# Altium PCB PCB1.PcbDoc
Units mm, origin at the board's own origin, x right, y up, seen from the top; angles counter-clockwise.
Board outline 76.58 x 53.47 mm, 2 copper layers (Top Layer, Bottom Layer); 39 components, 52 nets, 167 pads, 39 vias.
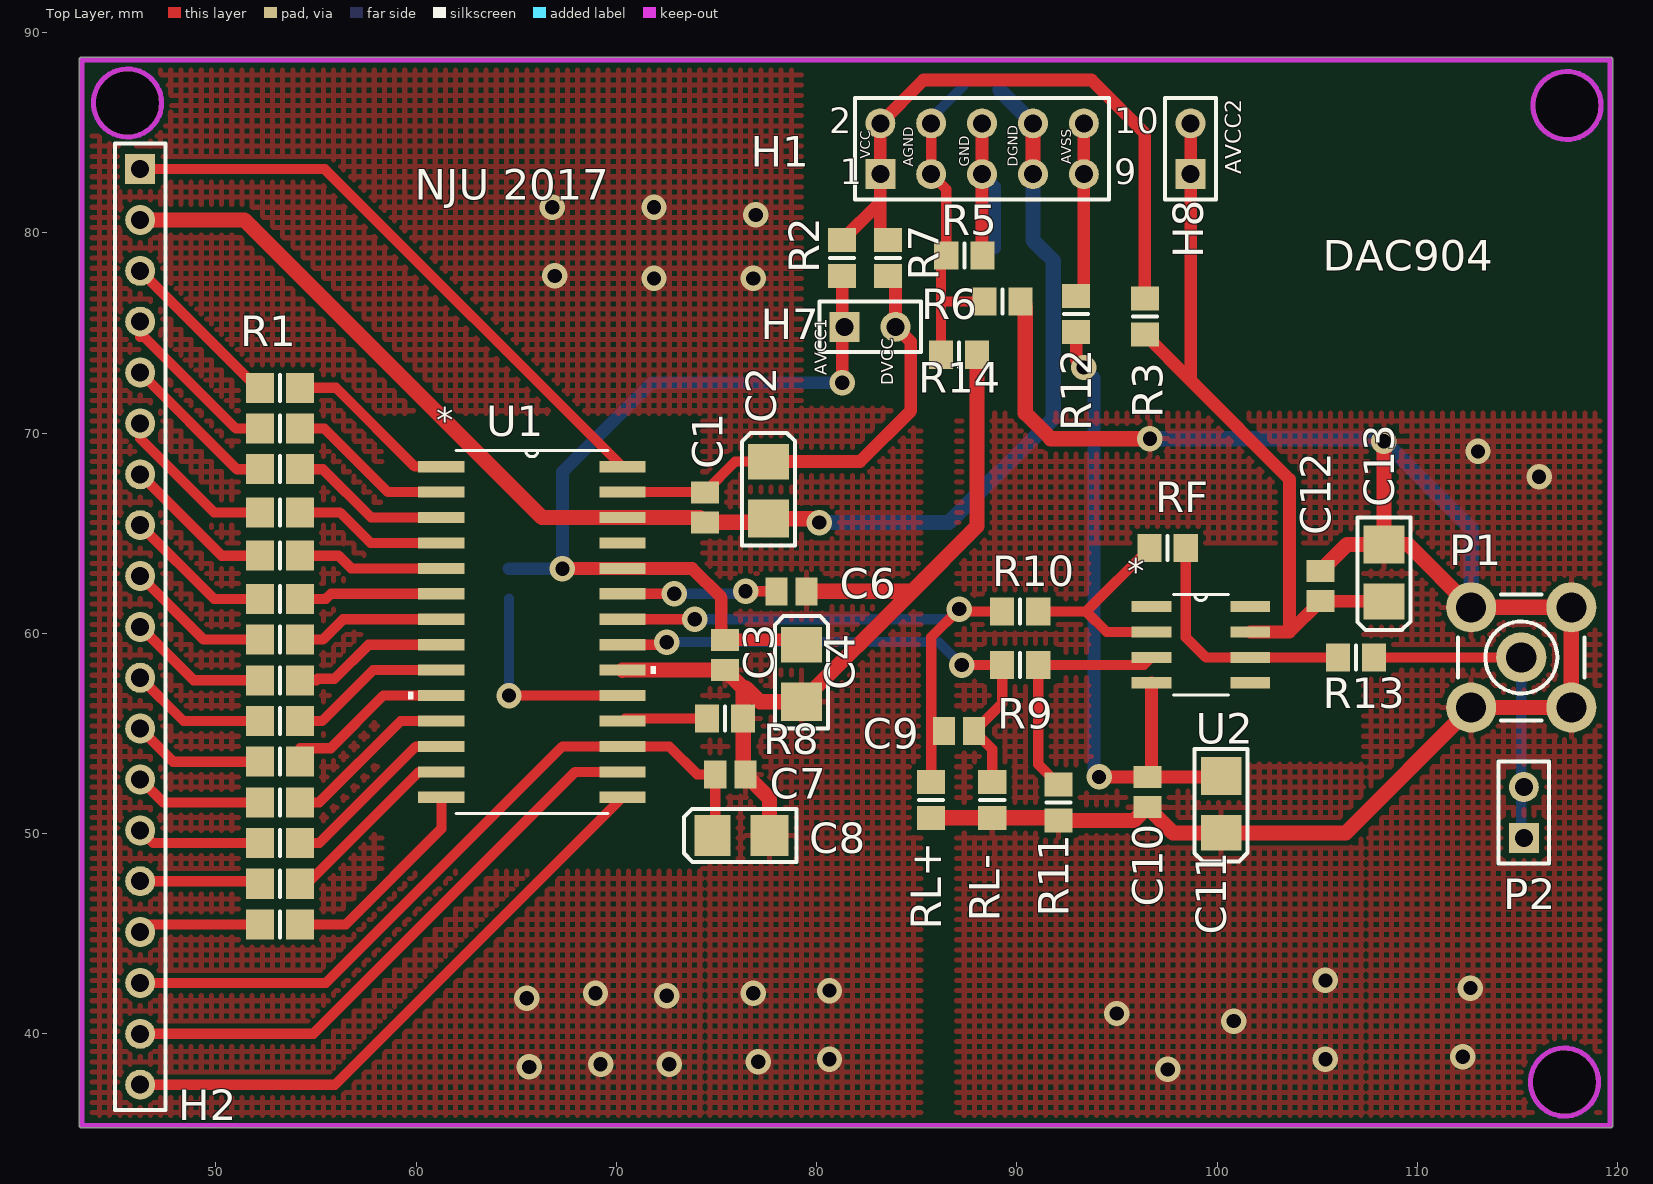
[diagram p0: Top Layer view]
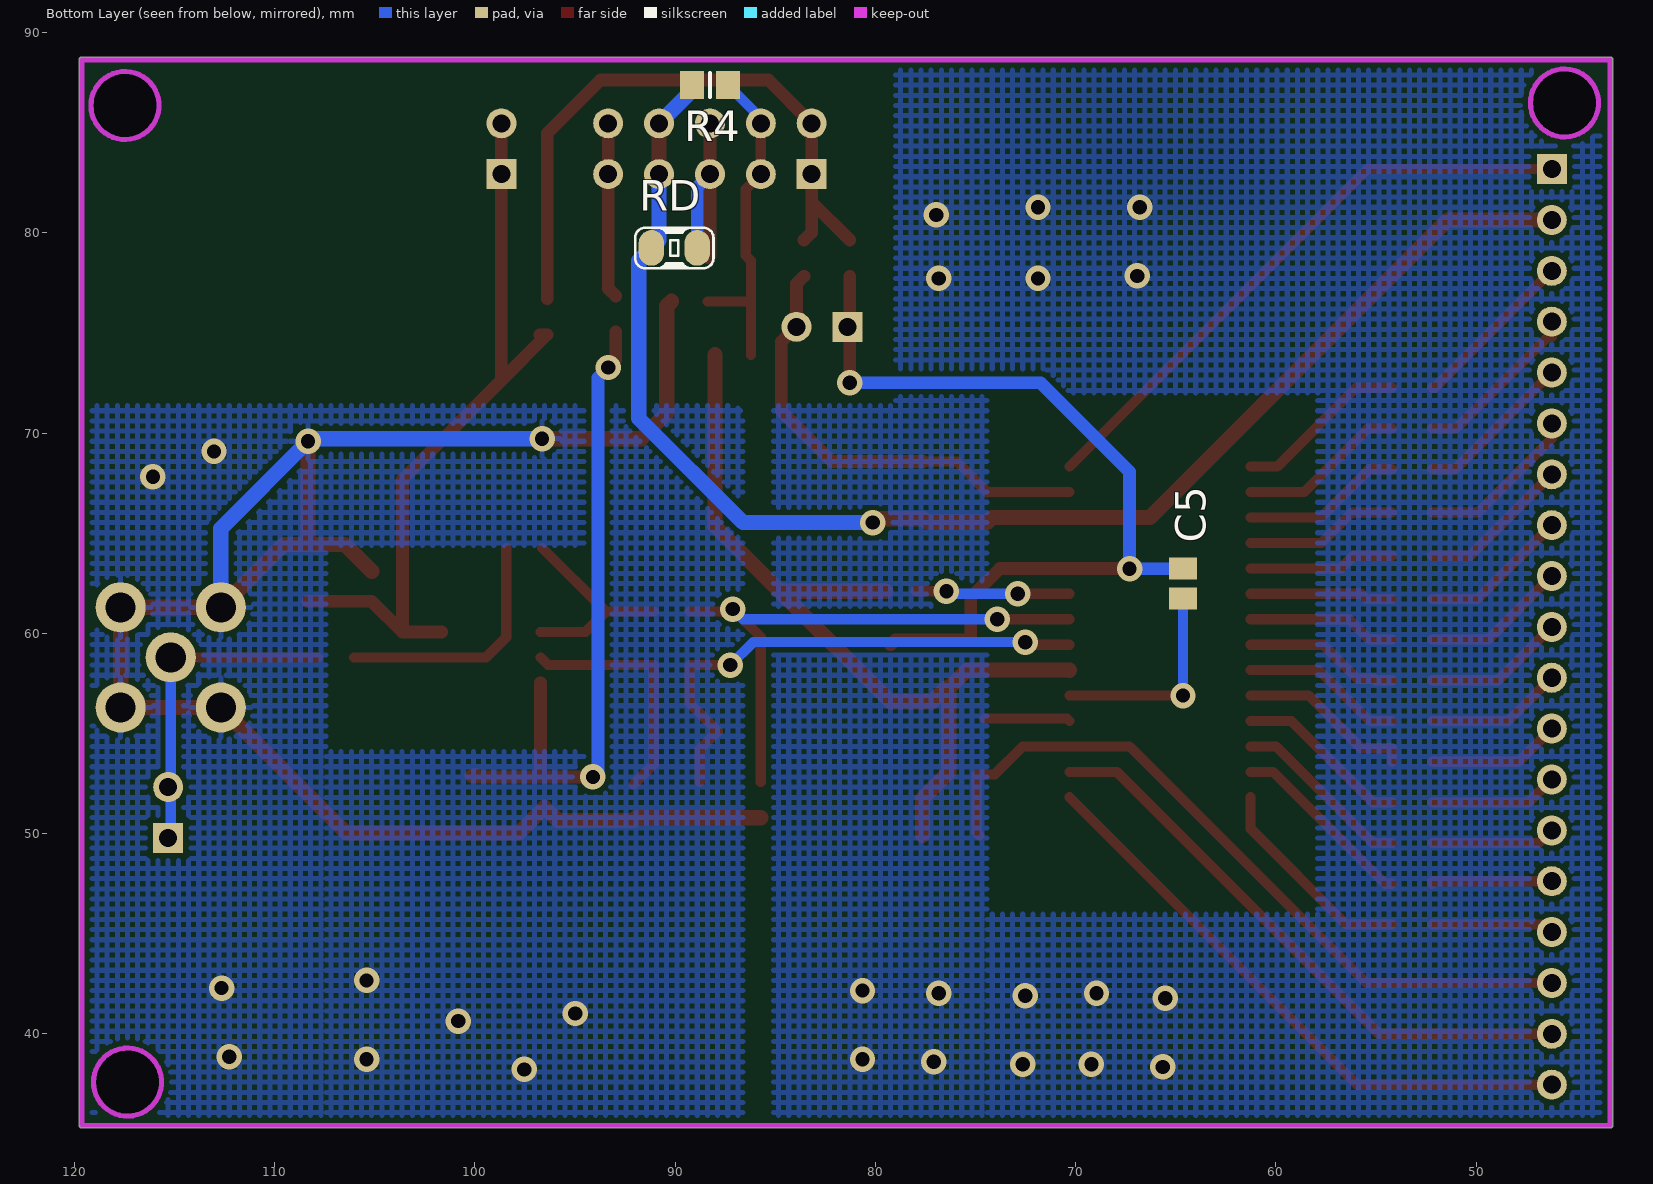
[diagram p1: Bottom Layer view, seen from below]

## Layer stack, top to bottom
Top Solder: solder mask 0.0102, Solder Resist, Dk 3.5
Top Layer: signal copper 0.0356
Dielectric 1: dielectric 0.32, FR-4, Dk 4.8
Bottom Layer: signal copper 0.0356
Bottom Solder: solder mask 0.0102, Solder Resist, Dk 3.5

## Board outline
43.18,35.433 ccw(c43.307,35.433) 43.307,35.306 119.634,35.306 ccw(c119.634,35.433) 119.761,35.433 119.761,88.646 ccw(c119.634,88.646) 119.634,88.773 43.307,88.773 ccw(c43.307,88.646) 43.18,88.646

## Design rules (kind name [scope] priority, off if disabled: settings)
Clearance [All] p1: gap=0.254
PolygonConnect [All] p1: connectstyle=Relief reliefconductorwidth=0.254 reliefentries=4 polygonreliefangle="90 Angle" airgapwidth=0.254
RoutingVias [All] p1: holewidth=0.711 width=1.27 viastyle="Through Hole" minholewidth=0.711 minwidth=1.27 maxholewidth=0.711 maxwidth=1.27
SolderMaskExpansion [All] p1: expansion=0.102
Width Power [InNetClass('Power')] p1: maxlimit=1.016 minlimit=0.508 preferedwidth=0.635 minimp=50.000000 maximp=50.000000 favimp=50.000000
Width GND [InNetClass('GND')] p2: maxlimit=1.016 minlimit=0.254 preferedwidth=0.762 minimp=50.000000 maximp=50.000000 favimp=50.000000
Width [All] p3: maxlimit=1.016 minlimit=0.254 preferedwidth=0.508 minimp=50.000000 maximp=50.000000 favimp=50.000000
30 further rules are at their usual default settings.

## Classes and differential pairs
net class GND: AGND1 AGND2 H4
net class Power: AVCC1 AVCC2 DVCC H1 H2 H5 VSS
component class DAC904: C1 C2 C3 C4 C5 C6 C7 C8 C9 C10 C11 C12 C13 H1 H2 P1 P2 R1 R2 R3 R4 R5 R6 R7 R8 R9 R10 R11 R12 R13 RF RL+ RL- U1 U2

## Components (designator, comment, footprint, x,y, rotation, side; value= is the part's Value field where it differs from the comment)
C1 "Cap" C0805 74.422,66.294 r90 top
C2 "Cap Pol3" CAP_SMD_3216 77.597,68.58 r270 top
C3 "Cap" C0805 75.438,58.928 r90 top
C4 "Cap Pol3" CAP_SMD_3216 79.248,59.436 r270 top
C5 "Cap" C0805 64.643,62.484 r270 bottom
C6 "Cap" C0805 78.74,62.103 r0 top
C7 "Cap" C0805 75.692,52.959 r180 top
C8 "Cap Pol3" CAP_SMD_3216 74.803,49.911 r0 top
C9 "Cap" C0805 87.122,55.118 r0 top
C10 "Cap" C0805 96.52,52.07 r90 top
C11 "Cap Pol3" CAP_SMD_3216 100.203,50.038 r90 top
C12 "Cap" C0805 105.156,62.357 r270 top
C13 "Cap Pol3" CAP_SMD_3216 108.331,61.595 r90 top
H1 "Header 5X2" HDR2X5 83.185,82.931 r0 top
H2 "Header 19" HDR1X19 46.228,83.185 r270 top
H7 "Comment" HDR1X2 81.407,75.311 r0 top
H8 "Comment" HDR1X2 98.679,82.931 r90 top
P1 "SMB" SMB_V-RJ45 115.189,58.801 r0 top
P2 "Header 2" HDR1X2 115.316,49.784 r90 top
R1 "Res Pack14" ResPack14 53.213,72.263 r0 top
R2 "Res2" 6-0805_N 81.28,78.74 r270 top
R3 "Res2" 6-0805_N 96.393,75.819 r90 top
R4 "Res2" 6-0805_N 88.265,87.376 r180 bottom
R5 "Res2" 6-0805_N 87.376,78.867 r180 top
R6 "Res2" 6-0805_N 89.281,76.581 r180 top
R7 "Res2" 6-0805_N 83.566,78.74 r90 top
R8 "Res2" 6-0805_N 75.438,55.753 r180 top
R9 "Res2" 6-0805_N 90.17,58.42 r180 top
R10 "Res2" 6-0805_N 90.17,61.087 r180 top
R11 "Res2" 6-0805_N 92.075,51.562 r270 top
R12 "Res2" 6-0805_N 92.964,75.946 r90 top
R13 "Res2" 6-0805_N 106.934,58.801 r180 top
R14 "Res2" 6-0805_N 87.122,73.914 r180 top (schematic designator R6)
RD "Comment" 0805R 91.186,79.248 r180 bottom
RF "Res2" 6-0805_N 97.536,64.262 r180 top
RL+ "Res2" 6-0805_N 85.725,51.689 r270 top
RL- "Res2" 6-0805_N 88.773,51.689 r270 top
U1 "DAC904_DW_28" DW28 65.786,60.071 r0 top
U2 "OPA691_D_8" D8 99.187,59.436 r0 top

## Footprints (in the part's own frame and the unit in brackets; to place one, negate y for a bottom-side part, rotate by r counter-clockwise, add the part's x,y. Pads: shape width x height; smd on the part's side, far side on the other; paste and mask are expansions set on the pad)
6-0805_N [mm] "Chip Resistor, Body 2.0x1.2mm, IPC Medium Density"
  rect 1.2x1.4 smd: 1(-0.9,0) 2(0.9,0)
  silkscreen extent 0,-0.6 0,0.6, body extent -1.07,-0.7 1.07,0.7, height 0.7
0805R [mil] "0805封装电阻"
  oval 50x70 smd: 1(0,0) 2(90,0)
  silkscreen extent -32,-40 122,40, body extent 3,-25 82,25, height 30
C0805 [mm] "Chip Capacitor, Body 2.0x1.3mm, IPC High Density"
  rect 1.1x1.4 smd: 1(-0.75,0) 2(0.75,0)
  body extent -1.1,-0.72 1.1,0.72, height 1.4
CAP_SMD_3216 [mil] "贴片钽电容，10uF"
  rect 70x80 smd: 1(0,0)
  rect 75x80 smd: 2(112.2,0)
  silkscreen extent -56,-52 165,52, body extent -11,-35 123,35, height 63
D8 [mil]
  rect 78x22 smd: 1(-97,75) 2(-97,25) 3(-97,-25) 4(-97,-75) 5(97,-75) 6(97,-25) 7(97,25) 8(97,75)
  silkscreen extent -54,-98 54,98, body extent -122,-98 122,98, height 69
DW28 [mil]
  rect 91x22 smd: 1(-178,325) 2(-178,275) 3(-178,225) 4(-178,175) 5(-178,125) 6(-178,75) 7(-178,25) 8(-178,-25) 9(-178,-75) 10(-178,-125) 11(-178,-175) 12(-178,-225) 13(-178,-275) 14(-178,-325) 15(178,-325) 16(178,-275) 17(178,-225) 18(178,-175) 19(178,-125) 20(178,-75) 21(178,-25) 22(178,25) 23(178,75) 24(178,125) 25(178,175) 26(178,225) 27(178,275) 28(178,325)
  silkscreen extent -244,-356 244,356, body extent -210,-356 210,356, height 104
HDR1X2 [mm] "Connector; Header; 2 Position"
  rect 1.5x1.5 hole 0.9: 1(0,0)
  round 1.5 hole 0.9: 2(2.54,0)
  silkscreen extent -1.27,-1.27 3.81,1.27
HDR1X19 [mm] "Connector; Header; 19 Position"
  rect 1.5x1.5 hole 0.9: 1(0,0)
  round 1.5 hole 0.9: 2(2.54,0) 3(5.08,0) 4(7.62,0) 5(10.16,0) 6(12.7,0) 7(15.24,0) 8(17.78,0) 9(20.32,0) 10(22.86,0) 11(25.4,0) 12(27.94,0) 13(30.48,0) 14(33.02,0) 15(35.56,0) 16(38.1,0) 17(40.64,0) 18(43.18,0) 19(45.72,0)
  silkscreen extent -1.27,-1.27 46.99,1.27
HDR2X5 [mm] "Connector; Header; 5x2 Position"
  rect 1.5x1.5 hole 0.9: 1(0,0)
  round 1.5 hole 0.9: 2(0,2.54) 3(2.54,0) 4(2.54,2.54) 5(5.08,0) 6(5.08,2.54) 7(7.62,0) 8(7.62,2.54) 9(10.16,0) 10(10.16,2.54)
  silkscreen extent -1.27,-1.27 11.43,3.81
ResPack14 [mm] "Chip Resistor, Body 2.0x1.2mm, IPC Low Density"
  rect 1.4x1.5 smd: 1(-1,0) 2(-1,-2.032) 3(-1,-4.064) 4(-1,-6.223) 5(-1,-8.382) 6(-1,-10.541) 7(-1,-12.573) 8(-1,-14.605) 9(-1,-16.637) 10(-1,-18.669) 11(-1,-20.701) 12(-1,-22.733) 13(-1,-24.765) 14(-1,-26.797) 15(1,-26.797) 16(1,-24.765) 17(1,-22.733) 18(1,-20.701) 19(1,-18.669) 20(1,-16.637) 21(1,-14.605) 22(1,-12.573) 23(1,-10.541) 24(1,-8.382) 25(1,-6.223) 26(1,-4.064) 27(1,-2.032) 28(1,0)
  silkscreen extent 0,-27.45 0,0.65, body extent -1.07,-27.5 1.07,0.7, height 0.7
SMB_V-RJ45 [mm] "Connector; SMB Straight"
  round 2.5 hole 1.5: 1(0,0) 2(-2.5,-2.5) 2(-2.5,2.5) 2(2.5,-2.5) 2(2.5,2.5)
  silkscreen extent -3.15,-3.15 3.15,3.15

## Part data
C1 C3 C5 C6 C7 C9 C10 C12: "Capacitor"
C2 C4 C8 C11 C13: "Polarized Capacitor (Surface Mount)"
H1: "Header, 5-Pin, Dual row"
H2: "Header, 19-Pin"
P1: "SMB Straight Connector"
P2: "Header, 2-Pin"
R1: "Isolated Resistor Network"
R2 R3 R4 R5 R6 R7 R8 R9 R10 R11 R12 R13 R14 RF RL+ RL-: "Resistor"
U1 U2: "Imported"

## Free pads (board coordinates)
  round 1.524 hole 3.15: 2(117.475,86.36) 3(117.348,37.592) 4(45.593,86.487)

## Via types
v1: diameter 1.27, hole 0.711, Top Layer to Bottom Layer, 39 vias

## Nets (pads, with @x,y where several pads share a name; then routed paths per layer and width w, separated by ;. In a path a pad name is that pad's centre, name@x,y a point inside that pad or via, vN(x,y) a via of type N, cw(c..) or ccw(c..) an arc to the next point about the centre after c; other vN are vias at no path point)
AGND: H1.3 H1.4 R4.2 R5.2 R6.2 R14.2 | length 16.7
  Top Layer w0.508: H1.4 H1.3 86.476,82.18 R5.2 86.222,78.613 86.222,76.581 ; R14.2 86.222,76.581 ; R6.2 86.222,76.581
  Bottom Layer w0.508: H1.4 85.725,85.736 R4.2
AGND1: C3.1 C4.2 C6.2 C7.1 C8.2 R8.1 R14.1 U1.20 | length 43.7
  Top Layer w0.762: U1.20 70.319,58.178 C3.1 76.338,57.278 ; C8.2 77.653,51.748 C7.1 76.338,53.063 R8.1 76.338,57.278 ; C6.2 84.653,62.103 84.709,62.047 ; R14.1@88.011,73.914 88.011,65.349 84.709,62.047 ; 76.338,57.278 76.479,57.278 77.171,56.586 C4.2 84.709,62.047
  other v1: 65.659,38.354 69.215,38.481 72.644,38.481 77.089,38.608 80.645,38.735 65.532,41.783 72.517,41.91 68.961,42.037 76.835,42.037 80.645,42.164 71.882,77.724 76.835,77.724 66.929,77.851 76.962,80.899 66.802,81.28 71.882,81.28
AGND2: C10.1 C11.1 C12.1 C13.2 P1.2 R6.1 R11.2 RL+.2 RL-.2 | length 94.2
  Top Layer w0.762: RL+.2 RL-.2 91.948,50.789 R11.2 95.862,50.662 C10.1 97.802,50.038 C11.1 106.426,50.038 112.689,56.301 117.689,56.301 117.689,61.301 112.689,61.301 109.545,64.445 C13.2 ; R6.1 90.424,76.338 90.424,70.993 91.694,69.723 v1(96.647,69.723) ; C12.1 106.494,64.445 C13.2 ; v1(108.331,69.596) C13.2
  Bottom Layer w0.762: v1(96.647,69.723) 108.204,69.723 v1(108.331,69.596) 112.689,65.238 P1.2@112.689,61.301
  other v1: 97.536,38.227 105.41,38.735 112.268,38.862 100.838,40.64 94.996,41.021 112.649,42.291 105.41,42.672 116.078,67.818 113.03,69.088
AVCC1: C3.2 C4.1 C5.1 H7.1 R2.2 U1.24 | length 43
  Top Layer w0.635: v1(67.311,63.234) 67.323,63.246 U1.24 73.787,63.246 75.248,61.785 75.248,59.678 C3.2 79.006,59.678 C4.1 ; v1(81.28,72.517) R2.2
  Bottom Layer w0.635: C5.1 v1(67.311,63.234) 67.311,68.073 71.755,72.517 v1@80.899,72.517
AVCC2: C12.2 C13.1 H8.1 H8.2 R3.1 U2.7 | length 38.4
  Top Layer w0.635: R3.1@96.763,74.919 R3.1 98.668,72.644 ; H8.2 H8.1 98.679,72.655 98.668,72.644 ; U2.7 103.62,60.071 ; C13.1 108.319,61.607 C12.2 103.62,60.071 ; 98.668,72.644 103.62,67.692 103.62,60.071
CLK: H2.1 U1.28 | length 30.2
  Top Layer w0.508: H2.1 55.448,83.185 U1.28
DVCC: C1.2 C2.1 H7.2 R7.1 U1.27 | length 23.3
  Top Layer w0.508: U1.27 C1.2@74.41,67.056 ; C1.2 C1.2@74.41,67.056 ; C2.1 75.934,68.58 C1.2@74.41,67.056
  Top Layer w0.635: C2.1 82.169,68.58 84.709,71.12 84.709,74.549 H7.2 83.947,77.459 R7.1
H1: H1.1 H1.2 R2.1 R3.2 R7.2 | length 32.1
  Top Layer w0.635: R2.1 83.185,81.545 ; R7.2 83.185,80.021 83.185,81.545 ; R3.2 96.393,84.963 93.726,87.63 85.344,87.63 H1.2 H1.1 83.185,81.545
H2: H1.5 H1.6 R5.1 RD.2 | length 10.7
  Top Layer w0.635: H1.6 H1.5 88.265,78.878 R5.1 R5.1@88.381,78.762
  Bottom Layer w0.635: H1.5 88.9,82.296 RD.2
H4: C1.1 C2.2 H1.7 H1.8 H2.2 R4.1 RD.1 U1.26 | length 71.9
  Top Layer w0.762: H2.2 51.435,80.645 66.294,65.786 U1.26 74.18,65.786 C1.1 77.411,65.544 C2.2 79.939,65.73 v1(80.137,65.532) ; H1.7 H1.8
  Bottom Layer w0.762: v1(80.137,65.532) 86.614,65.532 91.821,70.739 91.821,78.613 RD.1 90.805,79.629 H1.7 ; R4.1 89.165,87.111 H1.8
H5: H1.9 H1.10 R12.2 | length 8.8
  Top Layer w0.635: R12.2 93.345,77.227 H1.9 H1.10
INT/EXT: H2.18 U1.16 | length 29.5
  Top Layer w0.508: H2.18 54.864,40.005 67.945,53.086 U1.16
IOUT+: C9.1 R10.2 RL+.1 U1.22 | length 28.4
  Top Layer w0.508: U1.22 v1(73.914,60.706) ; RL+.1 85.725,59.817 v1(87.122,61.214) 87.249,61.087 R10.2
  Bottom Layer w0.508: v1(73.914,60.706) 86.614,60.706 v1(87.122,61.214)
IOUT-: C9.2 R9.2 RL-.1 U1.21 | length 26.3
  Top Layer w0.508: U1.21 72.39,59.436 v1(72.517,59.563) ; v1(87.249,58.42) R9.2 89.27,56.516 C9.2 88.773,54.217 RL-.1
  Bottom Layer w0.508: v1(72.517,59.563) 86.106,59.563 v1(87.249,58.42)
NetC5_2: C5.2 U1.19 | length 10.5
  Top Layer w0.508: v1(64.643,56.896) U1.19
  Bottom Layer w0.508: v1(64.643,56.896) C5.2
NetC6_1: C6.1 U1.23 | length 7.7
  Top Layer w0.508: U1.23 v1(72.898,61.976) ; v1(76.454,62.103) C6.1
  Bottom Layer w0.508: v1(72.898,61.976) 76.327,61.976 v1(76.454,62.103)
NetH2_3: H2.3 R1.1 | length 8.4
  Top Layer w0.508: H2.3 52.07,72.263 R1.1
NetH2_4: H2.4 R1.2 | length 8.6
  Top Layer w0.508: H2.4 46.228,74.803 46.431,74.803 51.003,70.231 R1.2
NetH2_5: H2.5 R1.3 | length 8
  Top Layer w0.508: H2.5 51.054,68.199 R1.3
NetH2_6: H2.6 R1.4 | length 8.3
  Top Layer w0.508: H2.6 46.228,69.734 49.922,66.04 R1.4
NetH2_7: H2.7 R1.5 | length 7.7
  Top Layer w0.508: H2.7 50.292,63.881 R1.5
NetH2_8: H2.8 R1.6 | length 7.5
  Top Layer w0.508: H2.8 49.911,61.722 R1.6
NetH2_9: H2.9 R1.7 | length 7.3
  Top Layer w0.508: H2.9 49.403,59.69 R1.7
NetH2_10: H2.10 R1.8 | length 7.1
  Top Layer w0.508: H2.10 48.895,57.658 R1.8
NetH2_11: H2.11 R1.9 | length 6.9
  Top Layer w0.508: H2.11 48.387,55.626 R1.9
NetH2_12: H2.12 R1.10 | length 6.7
  Top Layer w0.508: H2.12 47.879,53.594 R1.10
NetH2_13: H2.13 R1.11 | length 6.5
  Top Layer w0.508: H2.13 47.371,51.562 R1.11
NetH2_14: H2.14 R1.12 | length 6.2
  Top Layer w0.508: H2.14 46.863,49.53 R1.12
NetH2_15: H2.15 R1.13 | length 6.1
  Top Layer w0.508: H2.15 52.213,47.625 R1.13
NetH2_16: H2.16 R1.14 | length 6.4
  Top Layer w0.508: H2.16 46.228,45.466 R1.14
NetP1_1: P1.1 P2.1 P2.2 R13.1 | length 16.2
  Top Layer w0.508: R13.1 P1.1
  Bottom Layer w0.508: P2.1@115.189,49.911 P1.1
NetR1_15: R1.15 U1.14 | length 10.6
  Top Layer w0.508: R1.15 56.49,45.466 61.265,50.241 U1.14
NetR1_16: R1.16 U1.13 | length 9.4
  Top Layer w0.508: R1.16 54.559,47.498 60.147,53.086 U1.13
NetR1_17: R1.17 U1.12 | length 9.1
  Top Layer w0.508: R1.17 55.167,49.53 59.993,54.356 U1.12
NetR1_18: R1.18 U1.11 | length 8.7
  Top Layer w0.508: R1.18 55.168,51.562 59.232,55.626 U1.11
NetR1_19: R1.19 U1.10 | length 8.8
  Top Layer w0.508: R1.19 54.213,54.265 55.738,54.265 58.369,56.896 U1.10
NetR1_20: R1.20 U1.9 | length 8.1
  Top Layer w0.508: R1.20 55.312,55.626 57.852,58.166 U1.9
NetR1_21: R1.21 U1.8 | length 7.8
  Top Layer w0.508: R1.21 55.016,57.658 55.094,57.735 55.932,57.735 57.633,59.436 U1.8
NetR1_22: R1.22 U1.7 | length 7.5
  Top Layer w0.508: R1.22 55.347,59.69 56.363,60.706 U1.7
NetR1_23: R1.23 U1.6 | length 7.2
  Top Layer w0.508: R1.23 55.499,61.722 55.753,61.976 U1.6
NetR1_24: R1.24 U1.5 | length 7.3
  Top Layer w0.508: R1.24 56.134,63.881 56.769,63.246 U1.5
NetR1_25: R1.25 U1.4 | length 7.7
  Top Layer w0.508: R1.25 56.21,66.04 57.734,64.516 U1.4
NetR1_26: R1.26 U1.3 | length 8.1
  Top Layer w0.508: R1.26 55.347,68.199 57.76,65.786 U1.3
NetR1_27: R1.27 U1.2 | length 8.4
  Top Layer w0.508: R1.27 55.423,70.231 58.598,67.056 U1.2
NetR1_28: R1.28 U1.1 | length 8.7
  Top Layer w0.508: R1.28 56.007,72.263 59.944,68.326 U1.1
NetR8_2: R8.2 U1.18 | length 4.3
  Top Layer w0.508: U1.18 70.434,55.753 R8.2
NetR9_1: R9.1 R11.1 U2.3 | length 12.2
  Top Layer w0.508: R11.1 91.07,53.467 R9.1 96.342,58.42 U2.3
NetR10_1: R10.1 RF.2 U2.2 | length 10.6
  Top Layer w0.508: R10.1 93.472,61.087 ; RF.2 93.472,61.098 93.472,61.087 ; U2.2 94.488,60.071 93.472,61.087
NetR13_2: R13.2 RF.1 U2.6 | length 12.5
  Top Layer w0.508: RF.1 98.436,59.806 99.441,58.801 U2.6 R13.2
PD: H2.19 U1.15 | length 30
  Top Layer w0.508: H2.19 55.956,37.465 U1.15
VREF: C7.2 C8.1 H2.17 U1.17 | length 37.3
  Top Layer w0.508: H2.17 55.499,42.545 67.31,54.356 U1.17 72.644,54.356 74.041,52.959 C7.2 74.942,50.05 C8.1
VSS: C10.2 C11.2 R12.1 U2.4 | length 33.7
  Top Layer w0.635: R12.1 92.964,73.66 v1(93.345,73.279) ; v1(94.107,52.832) C10.2@96.532,52.832 ; U2.4 96.723,53.023 C10.2@96.532,52.832 ; C11.2 100.135,52.82 99.996,52.959 99.869,52.832 C10.2@96.532,52.832
  Bottom Layer w0.635: v1(93.345,73.279) 93.853,72.771 93.853,53.086 v1(94.107,52.832)
pads on no net: U1.25 U2.1 U2.5 U2.8

## Polygon pours and split planes (outlines as drawn)
AGND2 on Top Layer "GND2" (hatched 90Degree grid 0.508 track 0.254, pour order 0): 86.995,70.993 119.634,70.993 119.634,35.433 107.315,35.433 107.315,64.135 107.442,64.262 107.188,64.516 93.599,64.516 93.599,53.975 94.107,53.467 107.569,53.467 107.569,35.433 86.995,35.433 86.995,70.993
AGND1 on Top Layer "GND1" (hatched 90Degree grid 0.508 track 0.254, pour order 10): 43.307,88.646 79.121,88.646 79.248,88.519 79.248,71.247 85.217,71.247 85.217,35.433 74.168,35.433 74.295,35.56 74.295,70.993 58.293,70.993 58.293,48.133 74.422,48.133 74.549,48.006 74.549,35.56 43.434,35.56 43.307,35.433 43.307,88.392
AGND2 on Bottom Layer "GND2" (hatched 90Degree grid 0.508 track 0.254, pour order 4): 86.741,71.12 86.995,71.374 119.634,71.374 119.634,35.941 119.126,35.433 107.442,35.433 107.442,64.262 107.188,64.516 107.061,64.389 93.853,64.389 93.853,54.356 94.107,54.102 107.696,54.102 107.696,35.687 107.95,35.433 86.614,35.433 86.614,70.739 86.995,71.12
AGND1 on Bottom Layer "GND1" (hatched 90Degree grid 0.508 track 0.254, pour order 6): 43.307,88.646 78.994,88.646 78.994,71.12 79.248,71.374 85.09,71.374 85.09,35.433 74.422,35.433 74.422,71.882 74.549,72.009 57.912,72.009 57.912,45.974 74.676,45.974 74.676,35.56 74.549,35.433 43.307,35.433 43.307,88.646

## Keep-outs
Keep-Out Layer:
  circle w0.254: c117.348,37.592 r1.7
  circle w0.254: c117.475,86.36 r1.7
  circle w0.254: c45.593,86.487 r1.7
  lines w0.254: 43.307,35.433 43.307,88.646 119.634,88.646 119.634,35.433 43.307,35.433

## Silkscreen, mask and mechanical layers (free items; w line width, h text height)
Top Overlay:
  text "VCC" at 82.677,83.693 h0.5 r90
  text "AVSS" at 92.71,83.439 h0.5 r90
  text "AGND" at 84.836,83.312 h0.5 r90
  text "GND" at 87.63,83.312 h0.5 r90
  text "DGND" at 90.043,83.312 h0.5 r90
  text "AVCC2" at 101.219,82.931 h0.8 r90
  text "NJU 2017" at 59.944,81.661 h1.52
  text "DAC904" at 105.283,78.105 h1.52
  text "AVCC1" at 80.518,72.898 h0.6 r90
  text "DVCC" at 83.82,72.39 h0.6 r90

## Text inside footprints (layer, text, board x,y; h text height)
H1: Top Overlay "10" at 94.869,84.963 h1.27; Top Overlay "9" at 94.869,82.423 h1.27; Top Overlay "1" at 81.153,82.423 h1.27; Top Overlay "2" at 80.645,84.963 h1.27
U1: Top Overlay "*" at 61.011,70.028 h1.27; Mechanical 13 "*" at 61.011,70.028 h1.27
U2: Top Overlay "*" at 95.504,62.484 h1.27